# Altium PCB Micro2440.PcbDoc (part 1 of 2)
Units mil, origin at the board's own origin, x right, y up, seen from the top; angles counter-clockwise.
Board outline 3914 x 3499.3 mil, 2 copper layers (Top Layer, Bottom Layer); 61 components, 196 nets, 504 pads, 76 vias.
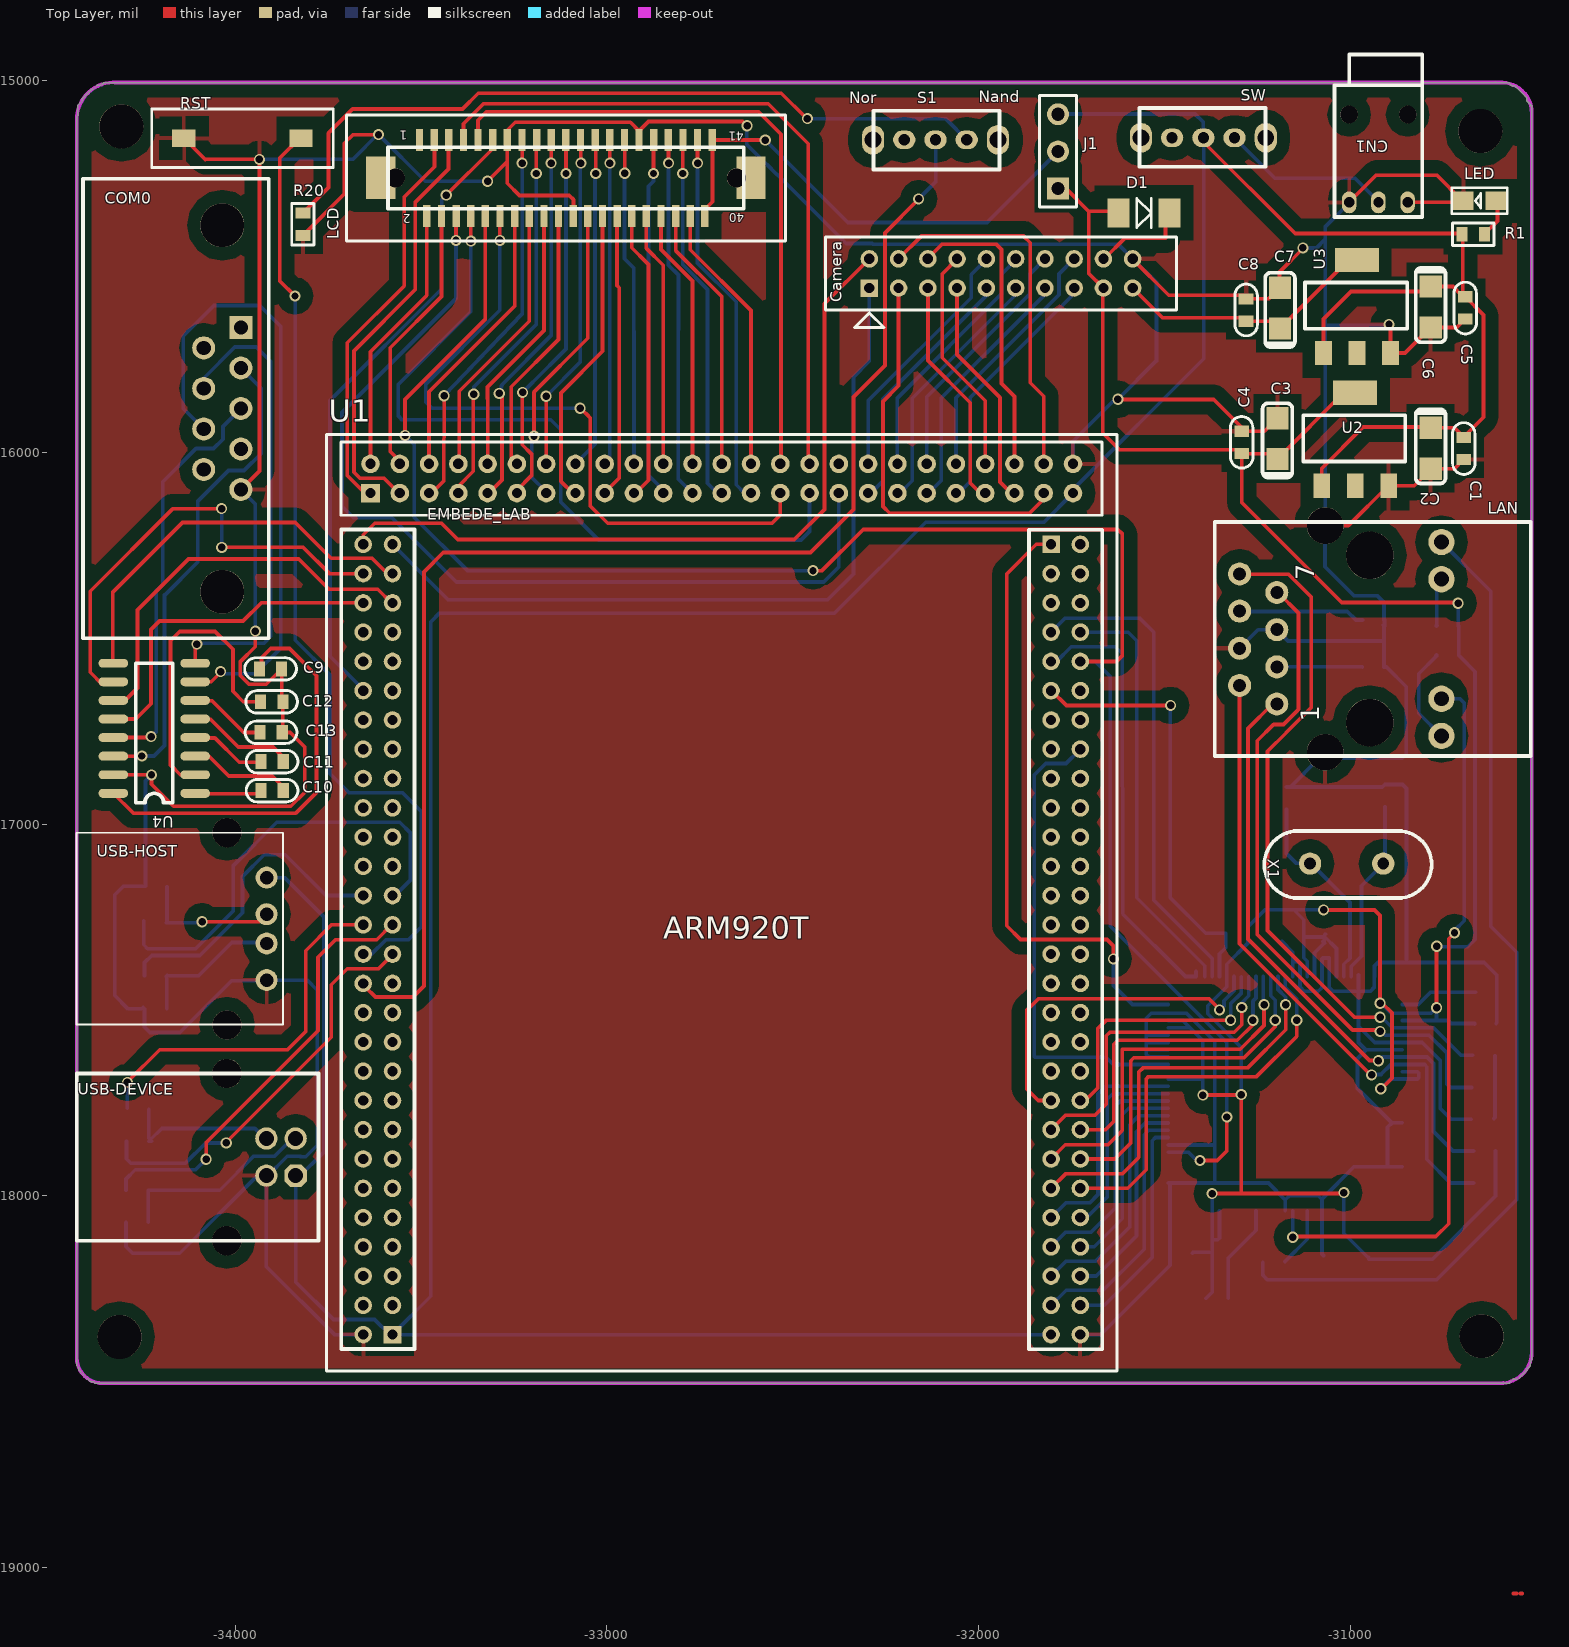
[diagram p0: Top Layer view]
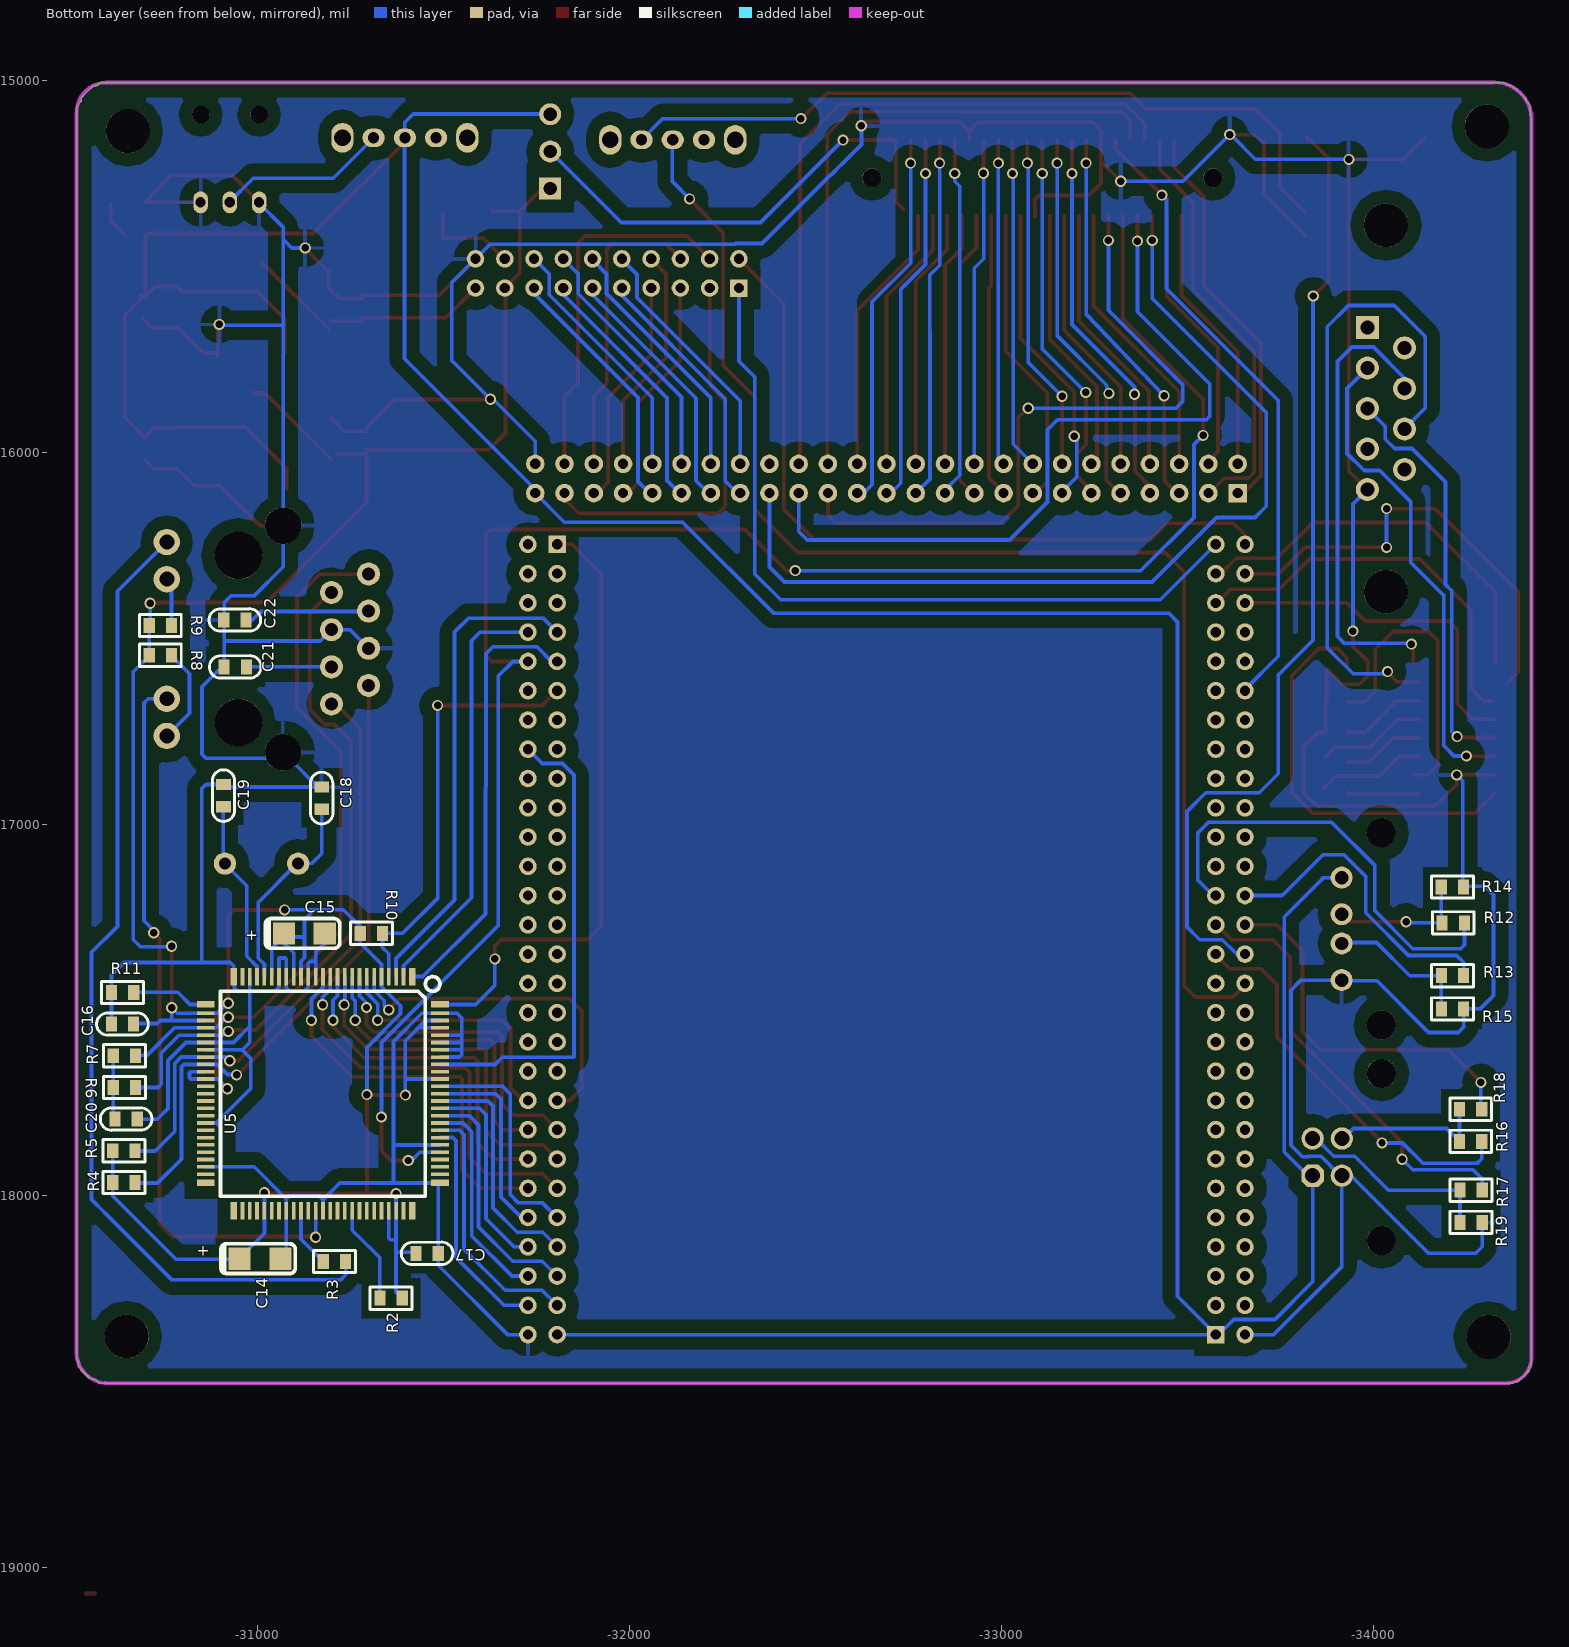
[diagram p1: Bottom Layer view, seen from below]

## Layer stack, top to bottom
Top Layer: signal copper 1.4
Dielectric: dielectric 12.6, FR-4, Dk 4.8
Bottom Layer: signal copper 1.4

## Board outline
-30598.21,-18504.31 -30572.65,-18504.31 -30571.02,-18502.67 -30562.69,-18494.34 -30553.67,-18494.34 -30551.36,-18494.34 -30545.11,-18488.1 -30524.99,-18467.98 -30524.99,-18467.05 -30516.44,-18458.49 -30516.44,-18446.47 -30512.05,-18442.08 -30512.05,-18422.74 -30512.05,-18388.93 -30512,-18388.88 -30512,-15095.34 -30512,-15068.86 -30518.89,-15061.97 -30525.01,-15055.85 -30525.01,-15050.31 -30525.01,-15045.91 -30539.91,-15031.01 -30556.92,-15013.99 -30566.29,-15013.99 -30574.32,-15005.97 -30585.98,-15005.97 -30608.9,-15005.97 -30609.87,-15005 -30610.4,-15005.53 -34345.49,-15005.53 -34353.67,-15005.53 -34356.4,-15008.26 -34361.19,-15013.05 -34366.96,-15013.05 -34371.71,-15013.05 -34378.24,-15019.58 -34381.56,-15022.9 -34386.55,-15022.9 -34386.55,-15023.61 -34399.18,-15036.24 -34410.98,-15048.04 -34410.98,-15052.67 -34410.98,-15054.75 -34419.3,-15063.07 -34423,-15066.77 -34423,-15083.89 -34423,-15094 -34426,-15097 -34426,-18436.3 -34426,-18456.5 -34420.33,-18462.17 -34420.33,-18469.44 -34409.14,-18480.64 -34389.27,-18500.51 -34380.6,-18500.51 -34376.8,-18504.31 -34356.93,-18504.31 -34282.37,-18504.31 -30598.21,-18504.31

## Design rules (kind name [scope] priority, off if disabled: settings)
Clearance [All] p1: gap=8
ComponentClearance [All] p1: gap=8 collisioncheckmode=3 verticalgap=10 showdistances=FALSE
FabricationTestpoint [(IsPad And (OnTopLayer Or OnBottomLayer))] p1: side=3 testpointundercomponent=TRUE minsize=40 maxsize=100 preferedsize=60 minholesize=0 maxholesize=40 preferedholesize=32 testpointgrid=1 allowsidetop=TRUE allowsidebottom=TRUE usegrid=TRUE gridtolerance=0.01
PolygonConnect [All] p1: connectstyle=Relief reliefconductorwidth=10 reliefentries=4 polygonreliefangle="90 Angle"
RoutingLayers [All] p1: top layer_v5=FALSE bottom layer_v5=FALSE
RoutingVias [All] p1: holewidth=20 width=30 viastyle="Through Hole" minholewidth=20 minwidth=30 maxholewidth=20 maxwidth=30
SMDNeckDown [All] p1: percent=110.000
SilkscreenOverComponentPads [All] p1: minsilkscreentomaskgap=10
SolderMaskExpansion [All] p1: expansion=4
Width [All] p1: maxlimit=12 minlimit=10 preferedwidth=11
24 further rules are at their usual default settings.

## Components (designator, comment, footprint, x,y, rotation, side; value= is the part's Value field where it differs from the comment)
C1 "Cap" 0603A -30696,-15960 r270 top
C2 "Cap2" C3216 -30784,-15934 r180 top
C3 "Cap2" C3216 -31196,-16018 r0 top
C4 "Cap" 0603A -31291,-16003 r90 top
C5 "Cap" 0603A -30692,-15582 r270 top
C6 "Cap2" C3216 -30784,-15554 r180 top
C7 "Cap2" C3216 -31189,-15667 r0 top
C8 "Cap" 0603A -31279,-15647 r90 top
C9 "Cap Semi" 0603A -33934.71,-16584 r0 top
C10 "Cap Semi" 0603A -33871,-16909 r180 top
C11 "Cap Semi" 0603A -33871,-16831 r180 top
C12 "Cap Semi" 0603A -33872,-16670 r180 top
C13 "Cap Semi" 0603A -33873.71,-16752 r180 top
C14 "10uF" C3216 -30950.56,-18169.35 r270 bottom
C15 "10uF" C3216 -31070,-17294.45 r270 bottom
C16 "0.1uF" 0603A -30665.41,-17536.83 r0 bottom
C17 "0.1uF" 0603A -31425.3,-18156.28 r180 bottom
C18 "22p" 0603A -31172.8,-16959.99 r90 bottom
C19 "22p" 0603A -30908.63,-16953.39 r90 bottom
C20 "0.1u" 0603A -30615.54,-17794.85 r180 bottom
C21 "104" 0603A -30968.89,-16576.09 r0 bottom
C22 "104" 0603A -30967.82,-16449.79 r0 bottom
Camera "CON20" IDC20SS -32294,-15558 r180 top locked
CN1 "DC_JACK" DC25 -30924,-15013 r180 top
COM0 "" DB9RA/M -33984.31,-15664.54 r90 top locked
D1 "1N4148" D1206 -31624.53,-15355.89 r0 top
J1 "" HDR1X3 -31786.24,-15290.62 r90 top
LAN "HR911103A" HR911103A -30948,-16501.53 r270 top
LCD "LCD41P" DF9B-41P-1V2 -32651,-15262 r180 top locked
LED "POWER" LED -30609,-15323 r180 top
R1 "500" 0603R -30639,-15413 r180 top
R2 "4.7K" 0603R -31327.63,-18276.01 r180 bottom
R3 "0" 0603R -31236.4,-18176.39 r0 bottom
R4 "50" 0603R -30670.01,-17963.9 r0 bottom
R5 "50" 0603R -30670.01,-17878.7 r0 bottom
R6 "50" 0603R -30610.54,-17709.1 r180 bottom
R7 "50" 0603R -30610.54,-17623.9 r180 bottom
R8 "1K" 0603R -30768,-16545.53 r0 bottom
R9 "1K" 0603R -30768,-16465.53 r0 bottom
R10 "4.7K" 0603R -31274.89,-17294.5 r180 bottom
R11 "6.8K" 0603R -30605.39,-17453.51 r180 bottom
R12 "22" 0603R -34185.16,-17266.39 r180 bottom
R13 "22" 0603R -34183.22,-17408.36 r180 bottom
R14 "15K" 0603R -34183,-17170 r180 bottom
R15 "15K" 0603R -34183.22,-17497.73 r180 bottom
R16 "1.5K" 0603R -34293.02,-17853.34 r0 bottom
R17 "22" 0603R -34294.11,-17984.61 r0 bottom
R18 "22" 0603R -34293.02,-17766.94 r0 bottom
R19 "470K" 0603R -34233.06,-18072.18 r180 bottom
R20 "1K" 0603R -33818.13,-15356.13 r270 top
RST "SW-PB" RST -33980.3,-15154.99 r180 top
S1 "CON5" PCBComponent_1 -32280.01,-15139.29 r0 top
SW "CON5" PCBComponent_1 -31231.36,-15173.89 r180 top
U1 "Micro2440" MICRO2440 -33636.3,-16109.77 r270 top locked
U2 "LM1117" SOT223S -30897,-16090 r90 top
U3 "LM1117" SOT223S -30892,-15733 r90 top
U4 "MAX3232SOP" SSOP16 -34108,-16917 r270 top locked
U5 "DM9000" QFP100 -31415,-17410 r0 bottom
USB-DEVICE "USB Port B type" USB-B -33837.52,-17945.77 r270 top locked
USB-HOST "USB Port A type" USB-A -33915.91,-17143.88 r270 top
X1 "25M" OSC2PR-1 -31108,-17106 r0 top

## Footprints (in the part's own frame and the unit in brackets; to place one, negate y for a bottom-side part, rotate by r counter-clockwise, add the part's x,y. Pads: shape width x height; smd on the part's side, far side on the other; paste and mask are expansions set on the pad)
0603A [mil]
  rect 30x40 smd: 1(-0.26,1.21) 2(59.74,1.21)
  silkscreen extent -40,-29 99,31
0603R [mil]
  rect 30x40 smd: 1(0.47,0.42) 2(60.47,0.42)
  silkscreen extent -26,-30 87,30
C3216 [mil]
  rect 60x60 smd: 1(0,0) 2(0,110)
  silkscreen extent -40,-50 40,150
D1206 [mm]
  rect 1.5x2 smd: 1(0.015,-0.01) 2(3.515,-0.01)
  silkscreen extent 1.26,-1.01 2.26,0.99
DB9RA/M [mil]
  rect 62x62 hole 38: 1(0.38,0.31)
  round 62 hole 38: 2(-108.62,0.31) 3(-217.62,0.31) 4(-326.62,0.31) 5(-435.62,0.31) 6(-54.62,100.31) 7(-163.62,100.31) 8(-272.62,100.31) 9(-381.62,100.31)
  round 118.11 hole 118.11: ""(-710.62,50.31) ""(275.38,50.31)
  silkscreen extent -836,-75 400,425
DC25 [mm]
  oval 1x1.5 hole 0.7: 1(2.012,7.989) 2(0.012,7.989) 3(-1.988,7.989)
  round 1.2 hole 1.2: A(-1.988,1.989) B(2.012,1.989)
  silkscreen extent -2.99,-2.11 3.01,8.99
DF9B-41P-1V2 [mm]
  rect 0.5x1.5 smd: 1(21.667,-2.605) 2(21.167,2.595) 3(20.667,-2.605) 4(20.167,2.595) 5(19.667,-2.605) 6(19.167,2.595) 7(18.667,-2.605) 8(18.167,2.595) 9(17.667,-2.605) 10(17.167,2.595) 11(16.667,-2.605) 12(16.167,2.595) 13(15.667,-2.605) 14(15.167,2.595) 15(14.667,-2.605) 16(14.167,2.595) 17(13.667,-2.605) 18(13.167,2.595) 19(12.667,-2.605) 20(12.167,2.595) 21(11.667,-2.605) 22(11.167,2.595) 23(10.667,-2.605) 24(10.167,2.595) 25(9.667,-2.605) 26(9.167,2.595) 27(8.667,-2.605) 28(8.167,2.595) 29(7.667,-2.605) 30(7.167,2.595) 31(6.667,-2.605) 32(6.167,2.595) 33(5.667,-2.605) 34(5.167,2.595) 35(4.667,-2.605) 36(4.167,2.595) 37(3.667,-2.605) 38(3.167,2.595) 39(2.667,-2.605) 40(2.167,2.595) 41(1.667,-2.605)
  round 1.3 hole 1.3: A(0.017,-0.005) B(23.317,-0.005)
  rect 2x2.9 smd: C(-0.983,-0.005) D(24.317,-0.005)
  silkscreen extent -3.33,-4.31 26.67,4.3
HDR1X3 [mm] "Connector; Header; 3 Position"
  rect 1.5x1.5 hole 0.9: 1(0,0)
  round 1.5 hole 0.9: 2(2.54,0) 3(5.08,0)
  silkscreen extent -1.27,-1.27 6.35,1.27
HR911103A [mil]
  round 62 hole 35: 1(175.67,-249.76) 2(125.67,-349.76) 3(75.67,-249.76) 4(25.67,-349.76) 5(-24.33,-249.76) 6(-74.33,-349.76) 7(-124.33,-249.76) 8(-174.33,-349.76)
  round 70.87 hole 40.16: 9(261.5,193.16) 10(161.5,193.16) 11(-160.16,193.16) 12(-260.16,193.16)
  round 98.42 hole 98.43: A(305.59,-119.83) B(-304.25,-119.83)
  round 127.95 hole 127.95: C(-224.33,0.24) D(225.67,0.24)
  silkscreen extent -314,-416 316,433
IDC20SS [mm]
  rect 1.2x1.2 hole 0.7: 1(0.002,0.003)
  round 1.2 hole 0.7: 2(0.002,-1.997) 3(-1.998,0.003) 4(-1.998,-1.997) 5(-3.998,0.003) 6(-3.998,-1.997) 7(-5.998,0.003) 8(-5.998,-1.997) 9(-7.998,0.003) 10(-7.998,-1.997) 11(-9.998,0.003) 12(-9.998,-1.997) 13(-11.998,0.003) 14(-11.998,-1.997) 15(-13.998,0.003) 16(-13.998,-1.997) 17(-15.998,0.003) 18(-15.998,-1.997) 19(-17.998,0.003) 20(-17.998,-1.997)
  silkscreen extent -21,-3.5 3,2.7
LED [mil]
  rect 55.12x50 smd: 1(-0.13,0.5) 2(86.87,0.5)
  silkscreen extent -32,-35 118,36
MICRO2440 [mm]
  rect 1.2x1.2 hole 0.7: PA1(57.501,1.512) PC1(3.501,46.512)
  round 1.2 hole 0.7: PA2(57.501,-0.488) PA3(55.501,1.512) PA4(55.501,-0.488) PA5(53.501,1.512) PA6(53.501,-0.488) PA7(51.501,1.512) PA8(51.501,-0.488) PA9(49.501,1.512) PA10(49.501,-0.488) PA11(47.501,1.512) PA12(47.501,-0.488) PA13(45.501,1.512) PA14(45.501,-0.488) PA15(43.501,1.512) PA16(43.501,-0.488) PA17(41.501,1.512) PA18(41.501,-0.488) PA19(39.501,1.512) PA20(39.501,-0.488) PA21(37.501,1.512) PA22(37.501,-0.488) PA23(35.501,1.512) PA24(35.501,-0.488) PA25(33.501,1.512) PA26(33.501,-0.488) PA27(31.501,1.512) PA28(31.501,-0.488) PA29(29.501,1.512) PA30(29.501,-0.488) PA31(27.501,1.512) PA32(27.501,-0.488) PA33(25.501,1.512) PA34(25.501,-0.488) PA35(23.501,1.512) PA36(23.501,-0.488) PA37(21.501,1.512) PA38(21.501,-0.488) PA39(19.501,1.512) PA40(19.501,-0.488) PA41(17.501,1.512) PA42(17.501,-0.488) PA43(15.501,1.512) PA44(15.501,-0.488) PA45(13.501,1.512) PA46(13.501,-0.488) PA47(11.501,1.512) PA48(11.501,-0.488) PA49(9.501,1.512) PA50(9.501,-0.488) PA51(7.501,1.512) PA52(7.501,-0.488) PA53(5.501,1.512) PA54(5.501,-0.488) PA55(3.501,1.512) PA56(3.501,-0.488) PC2(3.501,48.512) PC3(5.501,46.512) PC4(5.501,48.512) PC5(7.501,46.512) PC6(7.501,48.512) PC7(9.501,46.512) PC8(9.501,48.512) PC9(11.501,46.512) PC10(11.501,48.512) PC11(13.501,46.512) PC12(13.501,48.512) PC13(15.501,46.512) PC14(15.501,48.512) PC15(17.501,46.512) PC16(17.501,48.512) PC17(19.501,46.512) PC18(19.501,48.512) PC19(21.501,46.512) PC20(21.501,48.512) PC21(23.501,46.512) PC22(23.501,48.512) PC23(25.501,46.512) PC24(25.501,48.512) PC25(27.501,46.512) PC26(27.501,48.512) PC27(29.501,46.512) PC28(29.501,48.512) PC29(31.501,46.512) PC30(31.501,48.512) PC31(33.501,46.512) PC32(33.501,48.512) PC33(35.501,46.512) PC34(35.501,48.512) PC35(37.501,46.512) PC36(37.501,48.512) PC37(39.501,46.512) PC38(39.501,48.512) PC39(41.501,46.512) PC40(41.501,48.512) PC41(43.501,46.512) PC42(43.501,48.512) PC43(45.501,46.512) PC44(45.501,48.512) PC45(47.501,46.512) PC46(47.501,48.512) PC47(49.501,46.512) PC48(49.501,48.512) PC49(51.501,46.512) PC50(51.501,48.512) PC51(53.501,46.512) PC52(53.501,48.512) PC53(55.501,46.512) PC54(55.501,48.512) PC55(57.501,46.512) PC56(57.501,48.512)
  rect 1.27x1.27 hole 0.7: PB1(0.001,0.012)
  round 1.27 hole 0.7: PB2(-1.999,0.012) PB3(0.001,2.012) PB4(-1.999,2.012) PB5(0.001,4.012) PB6(-1.999,4.012) PB7(0.001,6.012) PB8(-1.999,6.012) PB9(0.001,8.012) PB10(-1.999,8.012) PB11(0.001,10.012) PB12(-1.999,10.012) PB13(0.001,12.012) PB14(-1.999,12.012) PB15(0.001,14.012) PB16(-1.999,14.012) PB17(0.001,16.012) PB18(-1.999,16.012) PB19(0.001,18.012) PB20(-1.999,18.012) PB21(0.001,20.012) PB22(-1.999,20.012) PB23(0.001,22.012) PB24(-1.999,22.012) PB25(0.001,24.012) PB26(-1.999,24.012) PB27(0.001,26.012) PB28(-1.999,26.012) PB29(0.001,28.012) PB30(-1.999,28.012) PB31(0.001,30.012) PB32(-1.999,30.012) PB33(0.001,32.012) PB34(-1.999,32.012) PB35(0.001,34.012) PB36(-1.999,34.012) PB37(0.001,36.012) PB38(-1.999,36.012) PB39(0.001,38.012) PB40(-1.999,38.012) PB41(0.001,40.012) PB42(-1.999,40.012) PB43(0.001,42.012) PB44(-1.999,42.012) PB45(0.001,44.012) PB46(-1.999,44.012) PB47(0.001,46.012) PB48(-1.999,46.012) PB49(0.001,48.012) PB50(-1.999,48.012)
  silkscreen extent -4,-2.99 60,51.01
OSC2PR-1 [mil]
  round 60 hole 32: 1(-0.31,-0.47) 2(196.69,-0.47)
  silkscreen extent -123,-93 327,87
PCBComponent_1 [mil]
  oval 60x80 hole 45: 1(-4,-20) 5(332,-20)
  oval 60x50 hole 30: 2(80,-20) 3(164,-20) 4(248,-20)
  silkscreen extent -3,-100 336,58
QFP100 [mm]
  rect 0.45x1.2 smd: 1(-0.002,0.012) 25(12.198,0.012) 51(12.198,16.012) 75(-0.002,16.012)
  rect 0.25x1.2 smd: 2(0.598,0.012) 3(1.098,0.012) 4(1.598,0.012) 5(2.098,0.012) 6(2.598,0.012) 7(3.098,0.012) 8(3.598,0.012) 9(4.098,0.012) 10(4.598,0.012) 11(5.098,0.012) 12(5.598,0.012) 13(6.098,0.012) 14(6.598,0.012) 15(7.098,0.012) 16(7.598,0.012) 17(8.098,0.012) 18(8.598,0.012) 19(9.098,0.012) 20(9.598,0.012) 21(10.098,0.012) 22(10.598,0.012) 23(11.098,0.012) 24(11.598,0.012) 52(11.598,16.012) 53(11.098,16.012) 54(10.598,16.012) 55(10.098,16.012) 56(9.598,16.012) 57(9.098,16.012) 58(8.598,16.012) 59(8.098,16.012) 60(7.598,16.012) 61(7.098,16.012) 62(6.598,16.012) 63(6.098,16.012) 64(5.598,16.012) 65(5.098,16.012) 66(4.598,16.012) 67(4.098,16.012) 68(3.598,16.012) 69(3.098,16.012) 70(2.598,16.012) 71(2.098,16.012) 72(1.598,16.012) 73(1.098,16.012) 74(0.598,16.012)
  rect 1.2x0.45 smd: 26(14.098,1.912) 50(14.098,14.112) 76(-1.902,14.112) 100(-1.902,1.912)
  rect 1.2x0.25 smd: 27(14.098,2.512) 28(14.098,3.012) 29(14.098,3.512) 30(14.098,4.012) 31(14.098,4.512) 32(14.098,5.012) 33(14.098,5.512) 34(14.098,6.012) 35(14.098,6.512) 36(14.098,7.012) 37(14.098,7.512) 38(14.098,8.012) 39(14.098,8.512) 40(14.098,9.012) 41(14.098,9.512) 42(14.098,10.012) 43(14.098,10.512) 44(14.098,11.012) 45(14.098,11.512) 46(14.098,12.012) 47(14.098,12.512) 48(14.098,13.012) 49(14.098,13.512) 77(-1.902,13.512) 78(-1.902,13.012) 79(-1.902,12.512) 80(-1.902,12.012) 81(-1.902,11.512) 82(-1.902,11.012) 83(-1.902,10.512) 84(-1.902,10.012) 85(-1.902,9.512) 86(-1.902,9.012) 87(-1.902,8.512) 88(-1.902,8.012) 89(-1.902,7.512) 90(-1.902,7.012) 91(-1.902,6.512) 92(-1.902,6.012) 93(-1.902,5.512) 94(-1.902,5.012) 95(-1.902,4.512) 96(-1.902,4.012) 97(-1.902,3.512) 98(-1.902,3.012) 99(-1.902,2.512)
  silkscreen extent -1.9,0.01 13.1,15.01
RST [mm]
  rect 1.6x1.2 smd: 1(-4,0) 2(4,0)
  silkscreen extent -6.2,-2 6.2,2
SOT223S [mil]
  rect 65x45 smd: 1(0,0) 2(0,90) 3(0,180)
  rect 65x118 smd: 4(250,90)
  silkscreen extent 65,-45 190,230
SSOP16 [mil]
  oval 24x80 smd: 1(0.44,0.31) 2(-49.56,0.31) 3(-99.56,0.31) 4(-149.56,0.31) 5(-199.56,0.31) 6(-249.56,0.31) 7(-299.56,0.31) 8(-349.56,0.31) 9(-349.56,-219.69) 10(-299.56,-219.69) 11(-249.56,-219.69) 12(-199.56,-219.69) 13(-149.56,-219.69) 14(-99.56,-219.69) 15(-49.56,-219.69) 16(0.44,-219.69)
  silkscreen extent -350,-160 25,-60
USB-A [mm]
  round 1.5 hole 0.92: 1(0.009,0.013) 2(2.509,0.013) 3(4.509,0.013) 4(7.009,0.013)
  round 2 hole 2: 5(10.079,-2.697) 6(-3.061,-2.697)
  silkscreen extent -3.06,-12.98 10.04,1.12
USB-B [mil]
  oct 60x60 hole 40: 1(0.24,0.17)
  round 60 hole 40: 2(-99.76,0.17) 3(-99.76,-78.57) 4(0.24,-78.57)
  round 78.74 hole 78.74: 5(175.24,-184.87) 6(-274.76,-184.87)
  silkscreen extent -275,-589 175,61

## Part data
C1 C2 C3 C4 C5 C6 C7 C8: "Capacitor"
C9 C10 C11 C12 C13: "Capacitor (Semiconductor SIM Model)"
C14 C15: library part ELECTRO1
C16 C17 C18 C19 C20: library part CAP
C21 C22: library part "CAP NP_0"
Camera S1 SW: "Connector"
CN1: library part CON3
COM0: library part "CONNECTOR DB9"
D1: library part DIODE
J1: library part "Header 3", "Header, 3-Pin"
LED: library part LED3, "Typical BLUE SiC LED"
R1 R8 R9 R20: library part RES1
R2 R3 R4 R5 R6 R7 R11: library part RES2
R10: library part R_0
R12 R13 R14 R15 R16 R17 R18 R19: library part RESISTOR_2
RST: "Switch"
U1 U4: library part Component_1
USB-DEVICE USB-HOST: library part USBPORT
X1: library part CRYSTAL

## Free pads (board coordinates)
  round 118.11 hole 118.11: 0(-34310.8,-18379.6) 1(-34306,-15123) 2(-30650,-15136) 3(-30646.71,-18377.93)

## Via types
v1: diameter 30, hole 20, Top Layer to Bottom Layer, 75 vias
v2: diameter 30, hole 20, Top Layer to Bottom Layer, tented top, 1 vias

## Nets (pads, with @x,y where several pads share a name; then routed paths per layer and width w, separated by ;. In a path a pad name is that pad's centre, name@x,y a point inside that pad or via, vN(x,y) a via of type N, cw(c..) or ccw(c..) an arc to the next point about the centre after c; other vN are vias at no path point)
AIN1: U1.PA36
AIN2: U1.PA33
ATN0: U1.PA35
CAM_HREF: Camera.6 U1.PB46 | length 813
  Top Layer w10: Camera.6@-32138,-15480 -32098,-15440 -31953.23,-15440 -31938.54,-15454.69 -31938.54,-15814.9 -31903.56,-15849.89 U1.PB46@-31903.56,-16031.09
CAM_PCLK: Camera.8 U1.PB44 | length 615.6
  Top Layer w10: Camera.8@-32058,-15480 -32098,-15520 -32098,-15745.36 -31982.3,-15861.06 U1.PB44@-31982.3,-16031.09
CAM_VSYNC: Camera.7 U1.PB45 | length 621.1
  Top Layer w10: Camera.7@-32058,-15558 -32058,-15558.1 -32058,-15737.11 -31942.23,-15852.88 -31942.23,-16080.15 -31912.56,-16109.83 U1.PB45@-31903.56,-16109.83
CAMCLK: Camera.5 U1.PB43 | length 623.2
  Top Layer w10: Camera.5@-32136,-15558 -32136,-15558.1 -32136,-15753.2 -32022.57,-15866.64 -32022.57,-16082.75 -31995.49,-16109.83 U1.PB43@-31982.3,-16109.83
CAMDATA0: Camera.16 U1.PB42 | length 682.4
  Bottom Layer w10: U1.PB42@-32061.04,-16031.09 -32061.04,-15853.04 -31784,-15576 -31784,-15520 Camera.16@-31744,-15480
CAMDATA1: Camera.15 U1.PB41 | length 687.1
  Bottom Layer w10: U1.PB41@-32061.04,-16109.83 -32054.24,-16109.83 -32022.74,-16078.32 -32022.74,-15852.74 -31744,-15574 Camera.15@-31744,-15558
CAMDATA2: Camera.14 U1.PB40 | length 685.5
  Bottom Layer w10: U1.PB40@-32139.78,-16031.09 -32139.78,-15851.34 -31862,-15573.56 -31862,-15520 Camera.14@-31820,-15478
CAMDATA3: Camera.13 U1.PB39 | length 687.5
  Bottom Layer w10: U1.PB39@-32139.78,-16109.83 -32133.85,-16109.83 -32100.24,-16076.22 -32100.24,-15853.55 -31978.4,-15731.7 ; -31977.7,-15731.7 -31820,-15574 Camera.13@-31820,-15558
CAMDATA4: Camera.12 U1.PB38 | length 683.8
  Bottom Layer w10: U1.PB38@-32218.52,-16031.09 -32218.52,-15853.64 -31938,-15573.12 -31938,-15520 Camera.12@-31898,-15480
CAMDATA5: Camera.11 U1.PB37 | length 705.5
  Bottom Layer w10: U1.PB37@-32218.52,-16109.83 -32211.67,-16109.83 -32178.43,-16076.59 -32178.43,-15854.37 -31900.37,-15576.31 Camera.11@-31900.37,-15558.1 ; Camera.11@-31898,-15576 Camera.11@-31898,-15558
CAMDATA6: Camera.10 U1.PB36 | length 683.3
  Bottom Layer w10: U1.PB36@-32297.26,-16031.09 -32297.26,-15861.36 -32020,-15584.1 -32020,-15522 Camera.10@-31978,-15480
CAMDATA7: Camera.9 U1.PB35 | length 688
  Bottom Layer w10: U1.PB35@-32297.26,-16109.83 -32289.62,-16109.83 -32257.08,-16077.29 -32257.08,-15856.4 -31979.11,-15578.43 Camera.9@-31979.11,-15558.1
CAMRST: Camera.4 U1.PB48 | length 1010
  Top Layer w10: Camera.4@-32216,-15480 -32154,-15418 -31879.4,-15418 -31861.3,-15436.1 -31861.3,-15812.78 -31824.82,-15849.26 U1.PB48@-31824.82,-16031.09 ; Camera.4@-32212,-15478 Camera.4@-32212,-15466
CDCLK: U1.PA42
DN0: R12.2 U1.PA31 | length 1203.7
  Bottom Layer w10: R12.2@-34246.06,-17259.88 -34246.06,-17324.95 -34235.47,-17335.54 -34106.78,-17335.54 -34004.81,-17233.56 -34004.81,-17111.69 -33888.16,-16995.03 -33557.49,-16995.03 -33528.62,-17023.9 -33528.62,-17150.9 -33570.23,-17192.5 U1.PA31@-33576.79,-17192.5
DN1: R17.1 U1.PA29 | length 1173.8
  Top Layer w10: v1(-34078,-17902) -34078,-17857.06 -34037.87,-17816.93 -34037.72,-17817.08 -34037.72,-17816.79 -33777.26,-17556.32 -33777.26,-17358.3 -33730.3,-17311.34 -33619.29,-17311.34 -33579.19,-17271.24 U1.PA29@-33576.79,-17271.24
  Bottom Layer w10: R17.1@-34293.63,-17985.03 -34293.63,-17955.17 -34268.73,-17930.27 -34106.44,-17930.27 v1@-34077.19,-17901.03
DP0: R13.2 U1.PA32 | length 846
  Bottom Layer w10: R13.2@-34243.69,-17407.94 -34243.69,-17372.76 -34224.47,-17353.54 -34095.06,-17353.54 -33980.07,-17238.55 -33980.07,-17141.08 -33921.78,-17082.79 -33865.16,-17082.79 -33755.45,-17192.5 U1.PA32@-33655.53,-17192.5
DP1: R18.1 U1.PA30 | length 1004.5
  Top Layer w10: v1@-34289,-17693 -34203,-17607 -33859,-17607 -33810,-17558 -33810,-17340.69 -33740.56,-17271.24 U1.PA30@-33655.53,-17271.24
  Bottom Layer w10: R18.1@-34290,-17764 v1(-34290,-17695)
EINT0: U1.PA18
EINT1: U1.PA17
EINT2: U1.PA16
EINT3: U1.PA15
EINT4: U1.PA14
EINT5: U1.PA13
EINT6: U1.PA12
EINT7: U1.PC1 U5.100 | length 1682.4
  Top Layer w10: U1.PC1@-31805.13,-16247.62 -31845.01,-16247.62 -31924.52,-16327.13 -31924.52,-17273.46 -31887.28,-17310.7 -31654.82,-17310.7 -31637.43,-17328.1 v1(-31637.43,-17362.8)
  Bottom Layer w10: v1@-31637.06,-17363.17 -31637.06,-17434.17 -31585.95,-17485.28 U5.100@-31489.87,-17485.28
EINT8: U1.PA11
EINT9: U1.PC2
EINT11: U1.PA10
EINT13: U1.PA9
EINT14: U1.PA8
EINT15: U1.PA7
EINT16: U1.PA6
EINT17: U1.PA5
EINT18: U1.PA4
EINT19: U1.PA3
EINT20: Camera.3 U1.PB47 | length 1076.8
  Top Layer w10: Camera.3@-32215.33,-15558.1 -32215.33,-15821.21 -32257.13,-15863 -32257.13,-16146.01 -32239.01,-16164.12 -31863.19,-16164.12 -31824.82,-16125.75 U1.PB47@-31824.82,-16109.83
GND: C1.2 C2.2 C3.2 C4.2 C5.2 C6.2 C7.2 C8.2 C9.2 C12.1 C13.1 C14.2 C15.2 C16.2 C17.2 C18.2 C19.2 C20.2 C21.2 C22.2 Camera.20 CN1.1 CN1.3 COM0.5 LAN.4 LAN.5 LAN.A LAN.B LCD.13 LCD.22 LCD.31 LED.2 R11.1 R14.2 R15.2 R19.2 R20.2 RST.2 U1.PA2 U1.PB50 U1.PC56 U2.1 U3.1 U4.15 U5.14 U5.15 U5.18 U5.19 U5.23 U5.25 U5.31 U5.32 U5.42 U5.48 U5.58 U5.63 U5.76 U5.81 U5.93 U5.94 U5.95 U5.96 U5.99 USB-DEVICE.4 USB-HOST.4 | length 20566.3
  Top Layer w10: U4.15@-34327.69,-16867.44 v1@-34229.44,-16867.44 ; v1(-34225,-16868) -34225,-16893 -34165.6,-16952.4 -33850.4,-16952.4 -33813,-16915 -33813,-16793 -33852,-16754 C13.1@-33863,-16754 ; RST.2@-34137.78,-15154.99 -34080.57,-15212.2 v1(-33934.79,-15212) -33934.79,-16050.32 COM0.5@-33984.63,-16100.16 ; v1(-33945.74,-16481.16) -33945.74,-16522.81 -33986,-16563.07 -33986,-16601 -33963,-16624 -33916.19,-16624 C9.2@-33874.97,-16582.79 -33874.97,-16673.03 C12.1@-33871.74,-16676.26 ; C13.1@-33873.45,-16753.21 -33871.74,-16753.21 C12.1@-33871.74,-16671.21 ; R20.2@-33817.71,-15416.6 -33706.36,-15305.25 -33706.36,-15168.81 -33683.16,-15145.61 v1@-33616.56,-15145.61 ; v1(-33321.07,-15270.89) -33268,-15217.83 ; LCD.22@-33090.65,-15364.16 LCD.22@-33090.65,-15343.35 ; LCD.22@-33090.65,-15341.35 -33089.98,-15340.67 -33089.98,-15320.21 -33101.04,-15309.15 -33234.85,-15309.15 -33268,-15276 -33268,-15133.44 -33246.56,-15112 -32936.79,-15112 -32913.49,-15135.3 LCD.31@-32913.49,-15159.43 ; LCD.31@-32913.49,-15135.46 -32888.03,-15110 -32675.88,-15110 ; -32674.83,-15109.91 -32635.25,-15109.91 v1@-32623.98,-15121.18 ; v1@-31624,-15858 -31367.47,-15858 C4.2@-31292.21,-15933.26 ; Camera.20@-31586,-15480 -31488.74,-15577.26 C8.2@-31280.21,-15577.26 ; C4.2@-31292.21,-15943.26 -31231.26,-15943.26 C3.2@-31196,-15908 ; C8.2@-31280.21,-15587.26 -31220.26,-15587.26 C7.2@-31191,-15558 ; C7.2@-31190.29,-15559.64 -31190.29,-15514.82 v1@-31128.08,-15452.61 ; LAN.B@-31067.83,-16197.28 -31005.28,-16197.28 U2.1@-30898,-16090 ; CN1.1@-31003.22,-15327.53 -30930,-15254.31 -30767.69,-15254.31 LED.2@-30698,-15324 ; U2.1@-30897,-16090 -30828,-16090 C2.2@-30782,-16044 ; v1(-30896,-15656) -30892,-15660 U3.1@-30892,-15742 ; U3.1@-30892,-15733 -30853,-15733 C6.2@-30784,-15664 -30714,-15664 C5.2@-30692,-15642 ; CN1.3@-30845.74,-15327.53 -30698.47,-15327.53 LED.2@-30698,-15328 ; C2.2@-30784,-16044 -30720,-16044 C1.2@-30696,-16020
  Bottom Layer w10: R19.2@-34293.53,-18071.76 -34293.53,-18137.33 -34276.41,-18154.45 -34149.03,-18154.45 -33941.15,-17946.58 USB-DEVICE.4@-33913.73,-17946.58 ; R15.2@-34247.35,-17493.66 R15.2@-34243.69,-17497.31 ; v1(-34225,-16868) -34241,-16884 -34241,-17167.68 -34300.37,-17167.68 -34323.71,-17191.02 -34323.71,-17461.59 -34287.99,-17497.31 R15.2@-34243.69,-17497.31 ; COM0.5@-33984.63,-16100.16 -33946,-16138.79 -33946,-16480.9 v1(-33945.74,-16481.16) ; v1@-33934.79,-15213.92 -33932.23,-15211.36 -33683.17,-15211.36 v1@-33614.85,-15143.05 ; USB-HOST.4@-33916.75,-17419.62 -33916.44,-17419.93 -33806.02,-17419.93 -33779,-17446.95 -33779,-17506 -33779,-17864 -33810,-17895 -33825,-17895 ; USB-DEVICE.4@-33916.09,-17946.02 -33916.09,-18190.18 -33732.66,-18373.61 U1.PA2@-33655.53,-18373.61 ; USB-HOST.4@-33915.38,-17419.81 -33912.12,-17421.65 -34010.19,-17421.65 -34149.19,-17560.66 -34229.25,-17560.66 -34243.69,-17546.22 R15.2@-34243.69,-17497.31 ; USB-DEVICE.4@-33914.05,-17948.05 -33860,-17894 -33824,-17894 ; v1@-33615.6,-15145.49 v1@-33614.4,-15145.49 ; v1@-33613.29,-15146.08 -33488.47,-15270.89 v1(-33321.07,-15270.89) ; v1@-32623.6,-15121.36 -32623.6,-15172.08 -32582.18,-15213.51 -32581.99,-15213.51 -32580.44,-15215.06 -32580.44,-15215.19 -32569.74,-15225.89 -32569.57,-15225.89 -32543.08,-15252.39 -32541.97,-15252.39 -32356.27,-15438.09 -32285.91,-15438.09 -32284,-15440 -31624.77,-15440 Camera.20@-31585.41,-15479.36 ; U1.PB50@-31746.08,-16031.09 -31746.08,-15970.34 -31633.17,-15857.43 v1(-31625.36,-15857.43) -31522.69,-15754.75 ; U1.PC56@-31726.39,-18373.61 -31671.52,-18373.61 -31485.04,-18187.13 -31485.04,-17969.63 -31488.16,-17966.51 U5.76@-31489.87,-17965.59 -31220,-17966 -31174.91,-18011.09 U5.63@-31174.91,-18040.39 ; Camera.20@-31586.69,-15478.04 -31521.59,-15543.15 -31521.59,-15754.75 ; Camera.20@-31584.39,-15480.39 Camera.20@-31584,-15480 ; -31548.51,-17587.64 U5.95@-31489.87,-17587.64 ; -31548.27,-17567.95 U5.96@-31489.87,-17567.95 ; -31548.17,-17607.32 U5.94@-31489.87,-17607.32 ; U5.81@-31489.87,-17863.23 -31365.96,-17863.23 -31364.78,-17864.4 ; U5.93@-31489.87,-17627.01 -31541.81,-17627.01 -31548.72,-17620.1 -31548.72,-17522.3 -31535.31,-17508.9 U5.99@-31489.87,-17508.9 -31440.87,-17508.9 -31364.78,-17584.99 -31364.78,-17864.4 ; -31364.78,-17965.11 -31364.78,-17864.4 ; LAN.4@-31297.76,-16527.2 -31248.09,-16477.53 LAN.5@-31198,-16477.53 ; LAN.5@-31197.76,-16477.2 -31167.43,-16507.53 -30909.64,-16507.53 -30909.15,-16507.05 ; C15.2@-31184,-17316 -31155.22,-17344.78 U5.14@-31155.22,-17410.47 ; -31174.91,-18010.91 -31164,-18000 -31086,-18000 -31076.48,-18009.52 -31076.48,-18156.65 C14.2@-31072.1,-18161.03 ; C18.2@-31171.58,-16900.25 -30914.02,-16900.25 C19.2@-30907.42,-16893.65 -30859.73,-16893.65 -30848.91,-16904.47 -30848.91,-17369.51 -30851.85,-17372.45 ; C18.2@-31160.97,-16900.25 -31084.01,-16823.3 -30860.68,-16823.3 -30849.66,-16812.27 -30849.66,-16630.46 -30902.81,-16577.31 C21.2@-30909.15,-16577.31 -30909.15,-16466.47 C22.2@-30911.29,-16464.33 ; -31155.22,-17369.74 -31140.7,-17369.74 -31135.54,-17374.9 -31135.54,-17438.46 -31124,-17450 -31086,-17450 -31076.48,-17440.48 U5.18@-31076.48,-17410.47 -31076.48,-17363.34 -31073.8,-17360.66 -31057.08,-17360.66 -31056.8,-17360.94 -31056.8,-17439.2 -31046,-17450 -30946,-17450 -30936,-17440 U5.25@-30936,-17410 ; v1(-31127.41,-15450.18) -31091.17,-15450.18 -31069.39,-15428.4 ; -31076.48,-18008.48 -30990.28,-17922.28 U5.48@-30859.94,-17922.28 ; LAN.B@-31068,-16197.53 -31068,-16308 -30989.72,-16386.28 -30927.09,-16386.28 -30909.53,-16403.83 C22.2@-30909.53,-16452.08 ; LAN.B@-31067.83,-16197.28 -31067.83,-15393.83 CN1.1@-31002.37,-15328.37 ; -31067.83,-15658 v1@-30898,-15658 ; -30978.06,-17450 U5.23@-30978.06,-17410.47 ; -30978,-17544 -30934.36,-17587.64 U5.31@-30859.94,-17587.64 -30806.36,-17587.64 -30758.15,-17635.85 -30758.15,-17765.37 -30729.22,-17794.31 C20.2@-30674.88,-17794.31 ; U5.23@-30978,-17406 -30978,-17587.58 -30957.58,-17608 ; U5.25@-30934.75,-17410.47 -30934.75,-17381.63 -30925.57,-17372.45 -30791.61,-17372.45 ; C22.2@-30908.08,-16451.01 -30908.26,-16467.74 -30909.24,-16466.76 C22.2@-30908,-16465.53 ; -30900,-17922 -30900,-17816 -30888.17,-17804.17 -30980.49,-17711.85 -30980.49,-17630.91 -30957.58,-17608 ; -30888,-17804 U5.42@-30860,-17804 ; U5.32@-30859.94,-17607.32 -30956.9,-17607.32 -30957.58,-17608 ; -30797.33,-17372.51 -30639.58,-17372.51 -30605.86,-17406.23 -30605.86,-17534.86 C16.2@-30607.35,-17536.35
  other v1: -33614.33,-15145.22 -32622.93,-15121.44
GPB0: U1.PA45
GPB1: LCD.11 U1.PA46 | length 1701.6
  Top Layer w10: v1(-33432,-15308) -33307.19,-15183.19 LCD.11@-33307.19,-15159.43
  Bottom Layer w10: U1.PA46@-33655.53,-16641.32 -33658.22,-16641.32 -33658.22,-16635.19 -33744.71,-16548.71 -33744.71,-15860.71 -33444,-15560 -33444,-15320 v1(-33432,-15308)
I2CSCL: Camera.2 U1.PA56 | length 2057
  Top Layer w10: U1.PA56@-33655.53,-16247.62 -33655.53,-16222.08 -33624.51,-16191.06 -33444.91,-16191.06 -33401.3,-16234.67 -32495.75,-16234.67 -32414.82,-16153.74 -32414.82,-16150.95 -32414.72,-16150.85 -32414.72,-15600.01 -32294.35,-15479.65 Camera.2@-32296,-15478
I2CSDA: Camera.1 U1.PA55 | length 2117.5
  Bottom Layer w10: U1.PA55@-33576.79,-16247.62 -33427.62,-16396.79 -32406.35,-16396.79 -32336.76,-16327.19 -32336.76,-15797.7 -32294,-15754.94 Camera.1@-32294,-15558
I2SLRCK: U1.PA40
I2SSCLK: U1.PA41
I2SSD0: U1.PA44
I2SSDI: U1.PA43
L3CLOCK: U1.PA39
L3DATA: U1.PA38
L3MODE: U1.PA37
LADDR0: U1.PC13
LADDR1: U1.PC15
LADDR2: U1.PC16 U5.92 | length 1279.2
  Bottom Layer w10: U1.PC16@-31726.39,-16798.8 -31765.06,-16837.47 -31819.52,-16837.47 -31850.03,-16867.98 -31850.03,-17626.33 -31849,-17627.36 -31657.38,-17627.36 -31638.04,-17646.69 U5.92@-31489.87,-17646.69
LADDR3: U1.PC17
LADDR4: U1.PC18
LADDR5: U1.PC19
LADDR6: U1.PC20
LADDR7: U1.PC21
LADDR8: U1.PC22
LADDR9: U1.PC23
LADDR10: U1.PC24
LADDR11: U1.PC25
LADDR12: U1.PC26
LADDR13: U1.PC27
LADDR14: U1.PC28
LADDR15: U1.PC29
LADDR16: U1.PC30
LADDR17: U1.PC31
LADDR18: U1.PC32
LADDR19: U1.PC33
LADDR20: U1.PC34
LADDR21: U1.PC35
LADDR22: U1.PC36
LADDR23: U1.PC37
LADDR24: U1.PC38
LCD_PWR: LCD.12 U1.PB29 | length 1878.1
  Top Layer w10: v1(-33288,-15430) LCD.12@-33288,-15364 ; v1(-33072.14,-15881.48) -33053.69,-15898.38 -33045.08,-15906.99 -33045.08,-16143.58 -32997.92,-16190.74 -32555.67,-16190.74 -32533.48,-16168.55 U1.PB29@-32533.48,-16109.83
  Bottom Layer w10: v1(-33288,-15430) -33288,-15618 -33487.66,-15817.66 -33487.66,-15863.59 -33469.77,-15881.48 -33104.28,-15881.48 v1(-33072.14,-15881.48)
LCDVF0: R16.1 U1.PA27 | length 1078.4
  Top Layer w10: v1@-34020,-17852 -33741.59,-17573.59 -33741.59,-17432.56 -33698.47,-17389.44 -33614.54,-17389.44 -33576.79,-17351.69 U1.PA27@-33576.79,-17349.98
  Bottom Layer w10: R16.1@-34292.55,-17853.76 -34292.55,-17900.61 -34280.88,-17912.27 -34133.76,-17912.27 -34079.39,-17857.9 v1@-34023.1,-17857.9
  other v1: -34024,-17858
LDATA0: U1.PC39 U5.6 | length 939.9
  Top Layer w10: U1.PC39@-31805.13,-17743.68 -31839.59,-17743.68 -31870.84,-17712.43 -31870.84,-17501.76 -31839.09,-17470 -31380.06,-17470 -31352.01,-17498.06 v1(-31352.01,-17500.23)
  Bottom Layer w10: v1@-31350.15,-17499.75 -31340,-17489.59 -31340,-17475.17 -31312.7,-17447.87 U5.6@-31312.7,-17410.47
LDATA1: U1.PC40 U5.7 | length 714.2
  Top Layer w10: U1.PC40@-31726.39,-17743.68 -31713.08,-17743.68 -31679.5,-17710.11 -31679.5,-17550.38 -31657.35,-17528.23 -31324.23,-17528.23 v1@-31324,-17528
  Bottom Layer w10: v1(-31322,-17528) -31322,-17483.54 -31293.1,-17454.65 U5.7@-31293.1,-17411.1
LDATA2: U1.PC41 U5.8 | length 891.5
  Top Layer w10: U1.PC41@-31805.13,-17822.42 -31766.42,-17783.71 -31686.58,-17783.71 -31656.42,-17753.56 -31656.42,-17569.66 -31646.76,-17560 -31312,-17560 -31292,-17540 -31292,-17486 -31292.08,-17486.08 v1(-31292.08,-17493.62)
  Bottom Layer w10: v1(-31292.08,-17493.62) v1@-31292,-17493.54 ; v1@-31291.71,-17495.42 -31291.71,-17480.66 -31273.23,-17462.17 U5.8@-31273.23,-17411.23
LDATA3: U1.PC42 U5.9 | length 836
  Top Layer w10: U1.PC42@-31726.39,-17822.42 -31658.78,-17822.42 -31636.38,-17800.03 -31636.38,-17592.66 -31625.72,-17582 -31304,-17582 -31262,-17540 v1(-31262,-17528)
  Bottom Layer w10: v1(-31262,-17528) -31262,-17476.4 -31253.72,-17468.13 U5.9@-31253.72,-17410.28
LDATA4: U1.PC43 U5.10 | length 984.5
  Top Layer w10: U1.PC43@-31805.13,-17901.17 -31766.71,-17862.74 -31651.87,-17862.74 -31613.3,-17824.18 -31613.3,-17606.12 -31296.11,-17606.12 -31232,-17542 v1@-31232,-17484
  Bottom Layer w10: U5.10@-31234,-17410 -31234,-17484 v1(-31232,-17486)
LDATA5: U1.PC44 U5.11 | length 938.5
  Top Layer w10: U1.PC44@-31726.39,-17901.17 -31633.67,-17901.17 -31590.83,-17858.32 -31590.83,-17637.3 -31583.86,-17630.33 ; -31582.37,-17628.84 -31286.08,-17628.84 -31202,-17544.76 v1(-31202,-17528)
  Bottom Layer w10: U5.11@-31214.17,-17410.64 -31214.17,-17461.83 -31202,-17474 v1(-31202,-17528)
LDATA6: U1.PC45 U5.12 | length 1093.9
  Top Layer w10: U1.PC45@-31805.13,-17979.9 -31766.44,-17941.22 -31613.4,-17941.22 -31568.96,-17896.78 -31568.96,-17666.93 -31558.09,-17656.06 -31276.66,-17656.06 -31174,-17553.4 v1(-31174,-17486)
  Bottom Layer w10: U5.12@-31194.59,-17410.47 -31194.59,-17445.41 -31174,-17466 v1(-31174,-17486)
LDATA7: U1.PC46 U5.13 | length 1069.4
  Top Layer w10: U1.PC46@-31726.39,-17979.9 -31598.85,-17979.9 -31548.92,-17929.98 -31548.92,-17685.58 -31542.89,-17679.56 -31252.28,-17679.56 -31144,-17571.27 v1@-31144,-17526
  Bottom Layer w10: U5.13@-31174.96,-17411.51 -31174.96,-17439.04 -31144,-17470 v1(-31144,-17528)
LDATA8: U1.PC47 U5.89 | length 619.8
  Bottom Layer w10: U1.PC47@-31805.13,-18058.65 -31765.71,-18019.22 -31701,-18019.22 -31678.68,-17996.9 -31678.68,-17726.57 -31657.86,-17705.75 U5.89@-31489.87,-17705.75
LDATA9: U1.PC48 U5.88 | length 528.8
  Bottom Layer w10: U1.PC48@-31726.39,-18058.65 -31709.31,-18058.65 -31653.83,-18003.17 -31653.83,-17739.84 -31639.43,-17725.43 U5.88@-31489.87,-17725.43
LDATA10: U1.PC49 U5.87 | length 638.3
  Bottom Layer w10: U1.PC49@-31805.13,-18137.38 -31766.02,-18098.27 -31697.67,-18098.27 -31632.3,-18032.9 -31632.3,-17758.78 -31618.64,-17745.12 U5.87@-31489.87,-17745.12
LDATA11: U1.PC50 U5.86 | length 554.8
  Bottom Layer w10: U1.PC50@-31726.39,-18137.38 -31688.91,-18137.38 -31613.7,-18062.18 -31613.7,-17782.29 -31596.22,-17764.8 U5.86@-31489.87,-17764.8
LDATA12: U1.PC51 U5.85 | length 654.9
  Bottom Layer w10: U1.PC51@-31805.13,-18216.12 -31765.07,-18176.06 -31685.31,-18176.06 -31593.43,-18084.18 -31593.43,-17809.62 -31568.29,-17784.49 U5.85@-31489.87,-17784.49
LDATA13: U1.PC52 U5.84 | length 571.4
  Bottom Layer w10: U1.PC52@-31726.39,-18216.12 -31683.6,-18216.12 -31575.43,-18107.95 -31575.43,-17827.83 -31551.59,-17804 -31551.42,-17804.17 U5.84@-31489.87,-17804.17